# Allegro board MACHLORA_02_03Jul25_02.brd
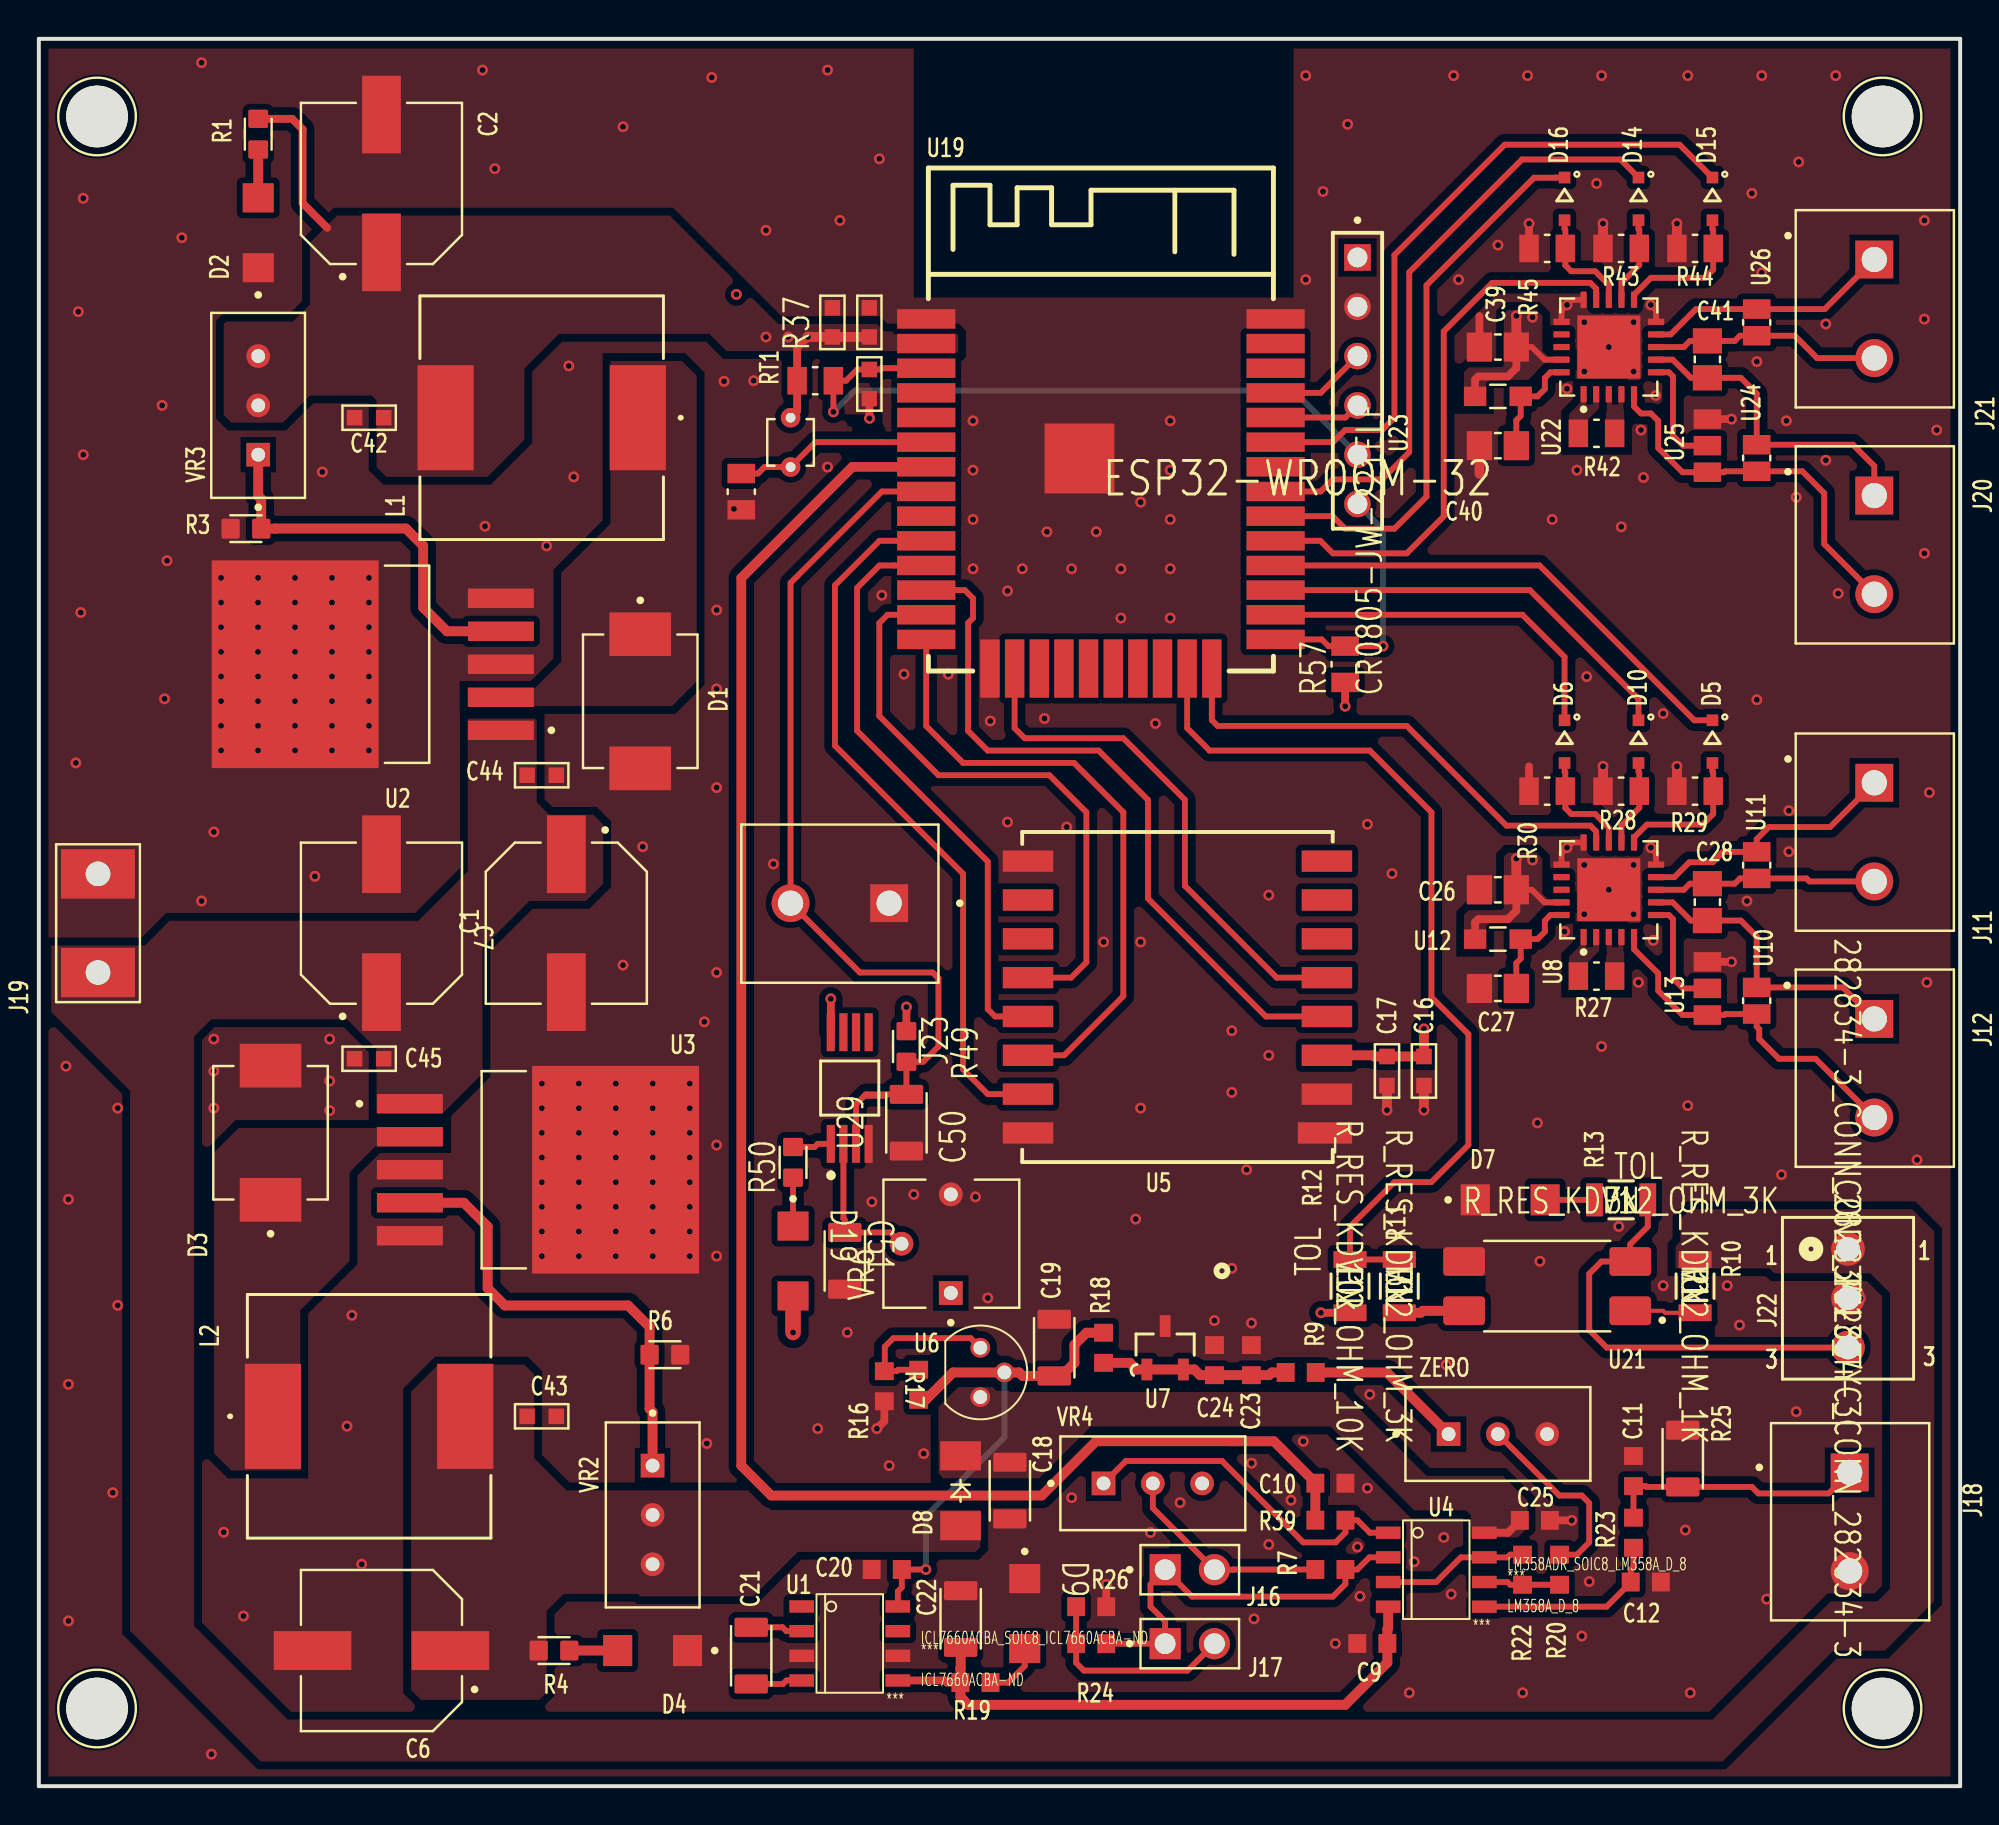
[diagram p0: board, top side]
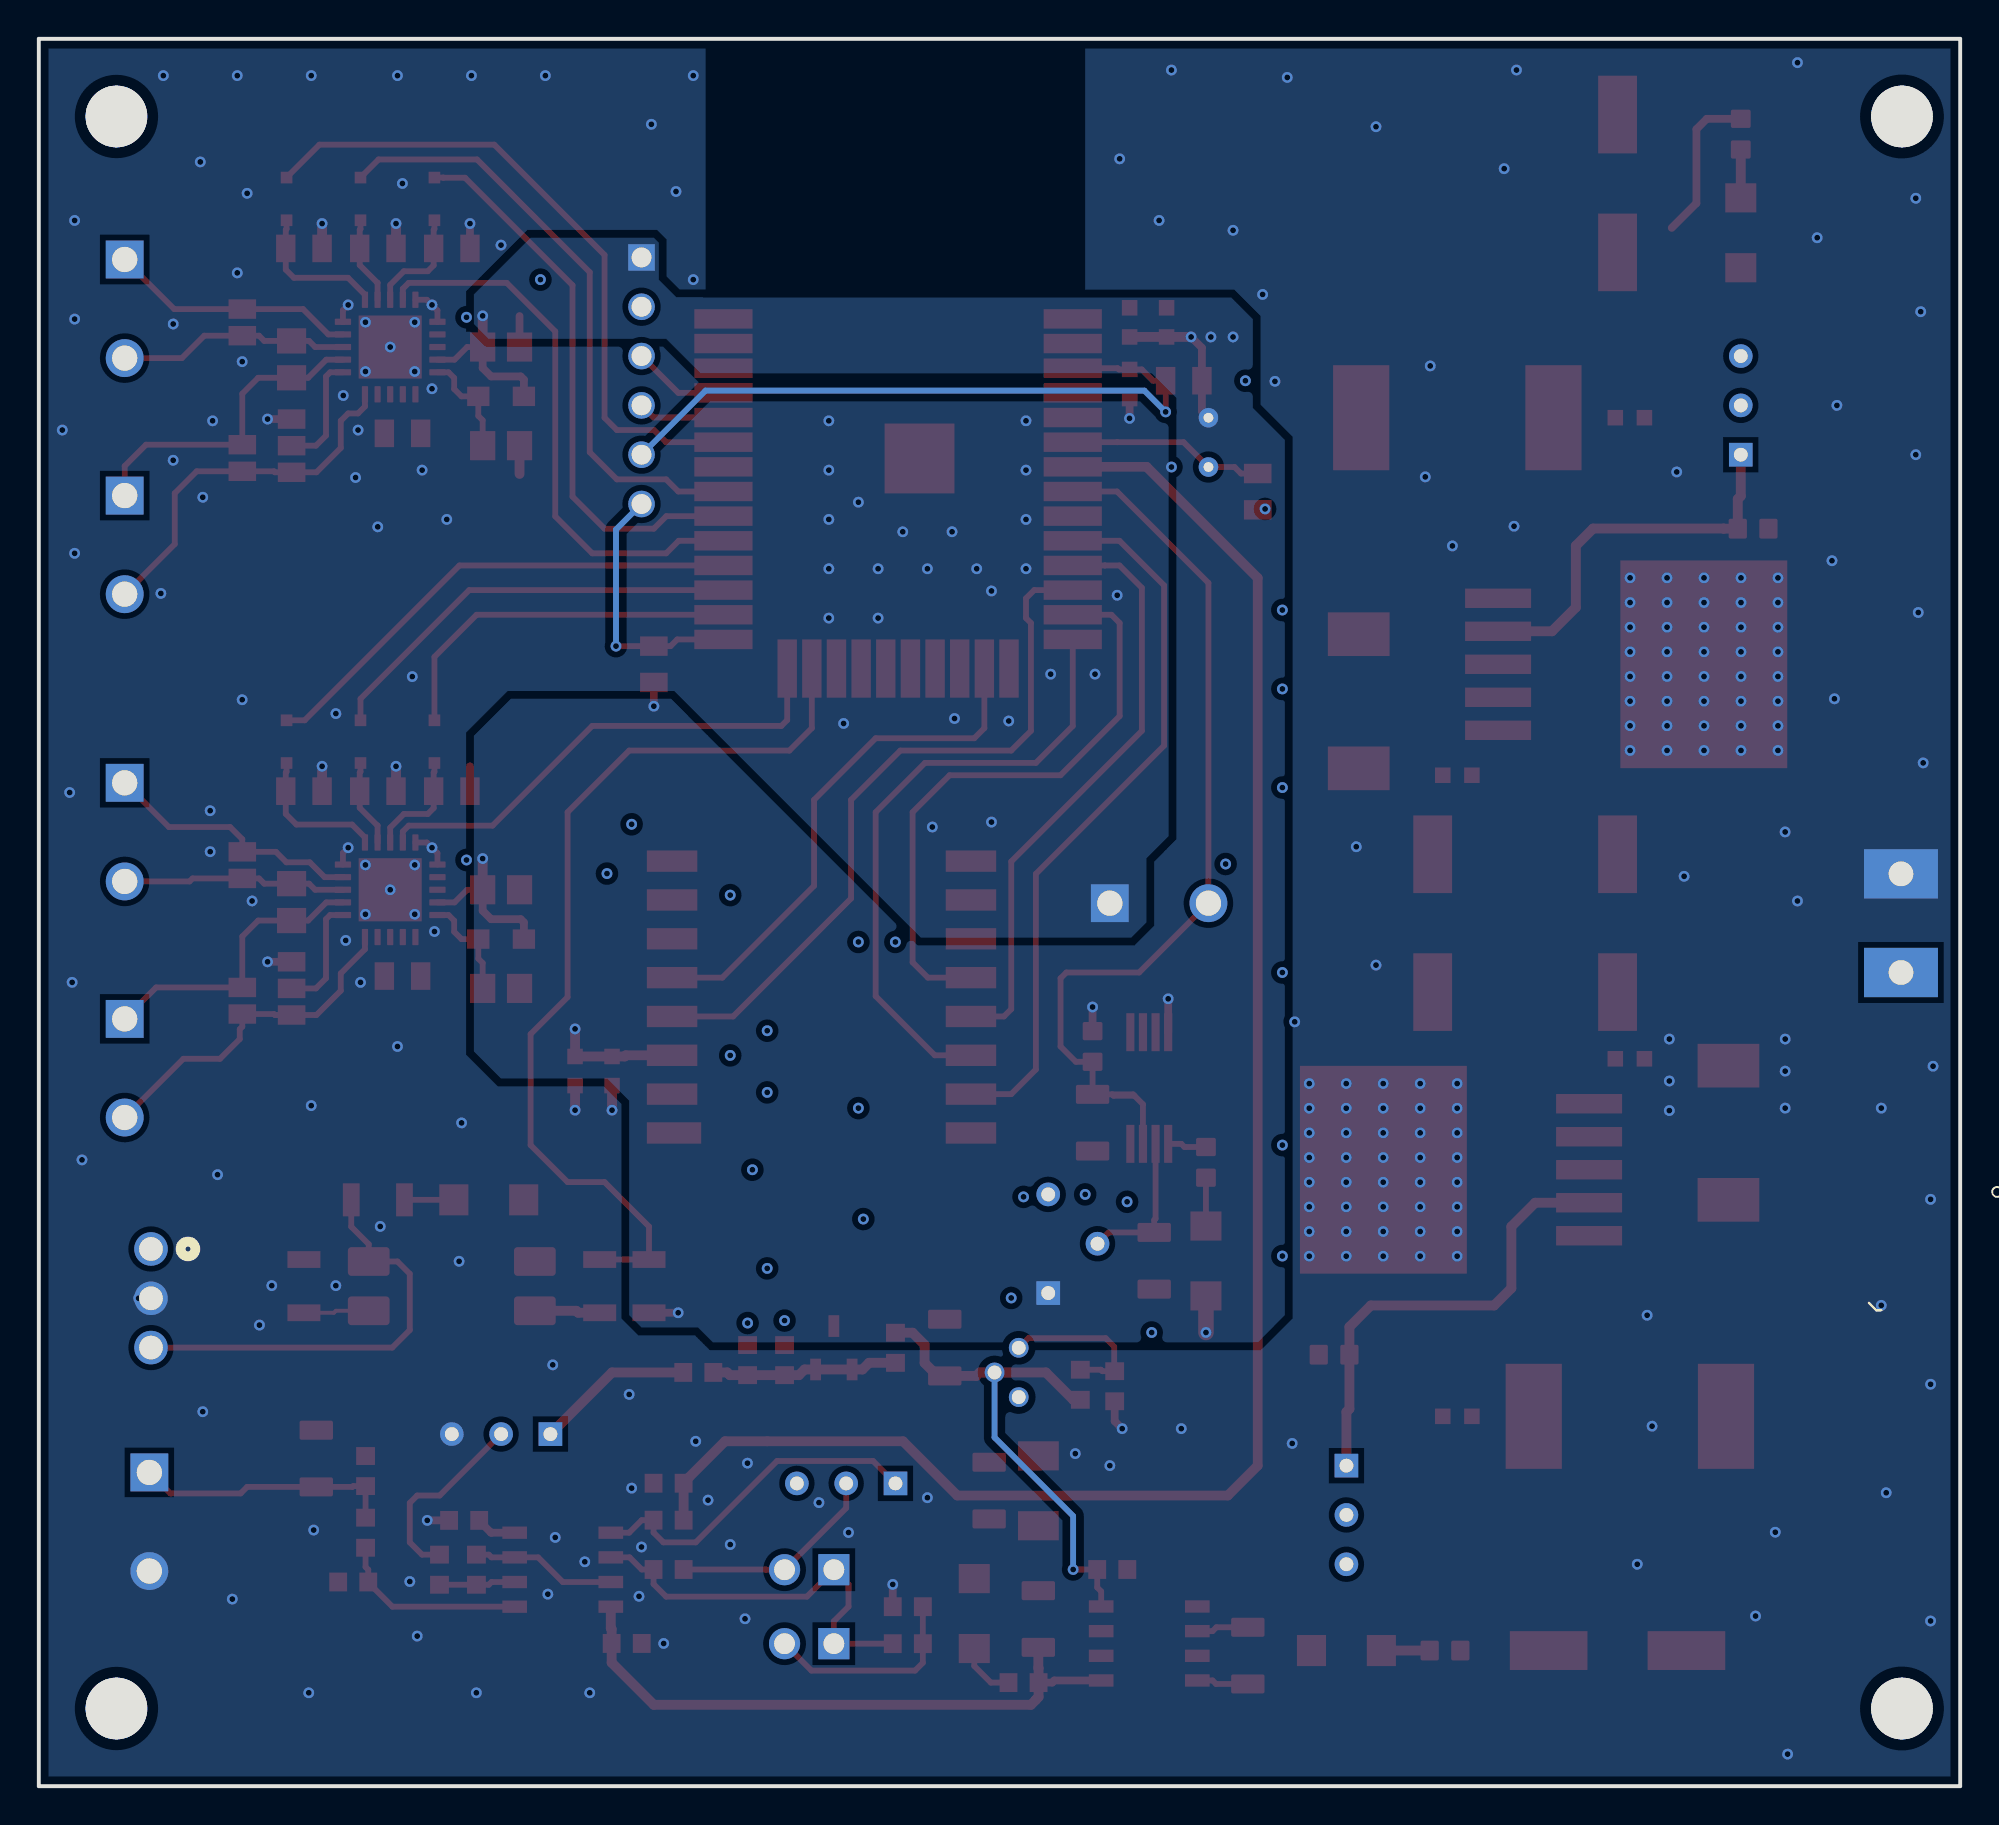
[diagram p1: board, bottom side, seen from below]

Outline 99 x 90 mm; copper layers: TOP, BOTTOM. Coordinates in mm from the lower left corner of the outline.
Outline path: 0,90 0,0 99,0 99,90 0,90

## Design rules (mm)
constraint set DEFAULT: min track width 0.3, pair gap 0.203
net group PWR: nets U1_VOUT VOUT

## Placement (name value [footprint] x y rotation side)
C1  100uF  [CAP_EEEFK1H101P]  27.18 44.45 270 top
C2  220uF  [CAP_EEEFK1V221P]  17.66 82.55 90 top
C6  220uF  [CAP_EEEFK1V221P]  17.66 6.99 180 top
C7  100uF  [CAP_EEEFK1H101P]  17.66 44.45 90 top
C9  100n  [CAPC1608X95]  68.71 7.35 180 top
C10  0.1n  [CAPC1608X95]  66.55 15.61 0 top
C11  0.1n  [CAPC1608X95]  82.17 16.23 270 top
C12  0.1n  [CAPC1608X95]  82.8 10.52 180 top
C16  10uF  [TUDIEN0603]  71.37 36.84 270 top
C17  0.1uF  [TUDIEN0603]  69.47 36.84 270 top
C18  10u  [RESC3015X65]  50.03 15.21 270 top
C19  10u  [RESC3015X65]  52.32 22.58 270 top
C20  100n  [CAPC1608X95]  43.69 11.16 180 top
C21  10u  [RESC3015X65]  36.7 6.71 270 top
C22  10u  [RESC3015X65]  47.5 8.62 90 top
C23  100n  [CAPC1608X95]  62.48 21.95 90 top
C24  1000n  [CAPC1608X95]  60.58 21.95 90 top
C25  100n  [CAPC1608X95]  77.08 13.69 0 top
C26  0.1uF  [TUDIEN0805]  75.18 46.17 0 top
C27  0.1uF  [TUDIEN0805]  75.18 41.09 180 top
C28  CAP NP  [TUDIEN0805]  85.97 45.53 90 top
C35  0.1uF  [TUDIEN0603]  42.8 75.39 90 top
C36  10uF  [TUDIEN0603]  40.89 75.39 90 top
C37  100nF  [TUDIEN0603]  42.8 72.22 270 top
C39  0.1uF  [TUDIEN0805]  75.18 74.12 0 top
C40  0.1uF  [TUDIEN0805]  75.18 69.05 180 top
C41  CAP NP  [TUDIEN0805]  85.97 73.49 90 top
C42  104  [TUDIEN0603]  17.02 70.48 180 top
C43  104  [TUDIEN0603]  25.91 19.05 0 top
C44  104  [TUDIEN0603]  25.91 52.07 0 top
C45  104  [TUDIEN0603]  17.02 37.47 180 top
C50  104  [RESC3015X65]  44.7 34.16 270 top
C51  104  [RESC3015X65]  41.53 27.05 270 top
D1  1N5822  [DIOM7959X265N]  30.99 55.88 270 top
D2  LED  [LED_LTST-C230KRKT]  11.3 80.01 90 top
D3  1N5822  [DIOM7959X265N]  11.94 33.66 90 top
D4  LED  [LED_LTST-C230KRKT]  31.62 6.99 180 top
D5  1N4148  [SOD323]  86.23 53.8 270 top
D6  1N4148  [SOD323]  78.61 53.8 270 top
D7  LED  [LED_LTST-C230KRKT]  75.81 30.2 0 top
D8  DIODE  [SOD-123]  47.49 15.21 270 top
D9  LED  [LED_LTST-C230KRKT]  50.8 8.89 270 top
D10  1N4148  [SOD323]  82.42 53.8 270 top
D14  1N4148  [SOD323]  82.42 81.75 270 top
D15  1N4148  [SOD323]  86.23 81.75 270 top
D16  1N4148  [SOD323]  78.61 81.75 270 top
D19  LED  [LED_LTST-C230KRKT]  38.86 27.05 270 top
J1  BBS-106-X-X  [SAMTEC_MTSW-106-24-T-S-380]  67.94 72.39 90 top
J11  CON2  [PHOENIX_1729128]  90.53 54.22 270 top
J12  CON2  [PHOENIX_1729128]  90.53 42.06 270 top
J16  CON2  [HARWIN_M20-9990246]  59.3 11.15 0 top
J17  CON2  [HARWIN_M20-9990246]  59.3 7.34 0 top
J18  CON2  [PHOENIX_1729128]  89.25 18.7 270 top
J19  CON2  [POWER_IN]  3.05 46.99 270 top
J20  CON2  [PHOENIX_1729128]  90.53 69.02 270 top
J21  CON2  [PHOENIX_1729128]  90.53 81.17 270 top
J22  CONN_282834-3  [CONN_282834-3_TYC]  93.22 27.67 270 top
J23  CON2  [PHOENIX_1729128]  46.35 49.53 180 top
L1  470uH  [IND_CDRH127LDNP-470MC_SUM]  25.91 70.48 180 top
L2  470uH  [IND_CDRH127LDNP-470MC_SUM]  17.02 19.05 0 top
NOREF  -  []  -132.08 -100.2 0 top
NOREF#2  -  []  0 0 90 top
NOREF#3  -  [unnamed#2]  3 86 270 top
NOREF#4  -  [unnamed#2]  3 4 270 top
NOREF#5  -  []  0 0 0 top
NOREF#6  -  [unnamed#2]  95 86 270 top
NOREF#7  -  [unnamed#2]  95 4 270 top
R1  1K  [RESC1608X50N_CPF0603F10KC1]  11.3 85.09 270 top
R3  330  [RESC1608X50N_CPF0603F10KC1]  10.67 64.77 180 top
R4  1K  [RESC1608X50N_CPF0603F10KC1]  26.55 6.99 0 top
R6  330  [RESC1608X50N_CPF0603F10KC1]  32.26 22.23 0 top
R7  15k  [CAPC1608X95]  66.55 11.16 0 top
R9  2k  [CAPC1608X95]  65.02 21.31 0 top
R10  1k  [RES_KDV12_OHM]  85.34 25.75 270 top
R11  3k  [RES_KDV12_OHM]  70.1 25.75 270 top
R12  10k  [RES_KDV12_OHM]  67.56 25.75 270 top
R13  3k  [RES_KDV12_OHM]  81.53 30.2 0 top
R16  280  [CAPC1608X95]  45.34 20.68 270 top
R17  240  [CAPC1608X95]  43.56 20.6 90 top
R18  4.7k  [CAPC1608X95]  54.86 22.58 270 top
R19  10k  [CAPC1608X95]  48.26 5.33 180 top
R20  20.5k  [CAPC1608X95]  78.36 11.15 90 top
R22  10k  [CAPC1608X95]  76.45 11.15 270 top
R23  10k  [CAPC1608X95]  82.17 13.05 90 top
R24  51k  [CAPC1608X95]  54.23 7.34 0 top
R25  1  [RESC3015X65]  84.7 16.86 270 top
R26  10k  [CAPC1608X95]  54.23 9.24 0 top
R27  430  [DIENTRO0805]  80.26 41.73 180 top
R28  10K  [DIENTRO0805]  81.53 51.25 0 top
R29  10K  [DIENTRO0805]  85.34 51.25 0 top
R30  10K  [DIENTRO0805]  77.72 51.25 0 top
R37  10K  [DIENTRO0805]  40.01 72.39 0 top
R39  10  [CAPC1608X95]  66.55 13.7 0 top
R42  430  [DIENTRO0805]  80.26 69.68 180 top
R43  10K  [DIENTRO0805]  81.53 79.2 0 top
R44  10K  [DIENTRO0805]  85.34 79.2 0 top
R45  10K  [DIENTRO0805]  77.72 79.2 0 top
R46  10K  [DIENTRO0805]  36.2 66.67 90 top
R49  10k  [RESC1608X50N_CPF0603F10KC1]  44.7 38.1 270 top
R50  1k  [RESC1608X50N_CPF0603F10KC1]  38.86 32.13 90 top
R57  10K  [DIENTRO0805]  67.31 57.78 90 top
RT1  NTC  [THERM_701007-M]  38.73 69.22 270 top
U1  ICL7660ACBA-ND  [SOIC8]  41.78 7.35 0 top
U2  LM2596  [VREG_LM2596S-33NOPB]  13.21 57.78 180 top
U3  LM2596  [VREG_LM2596S-33NOPB]  29.72 31.75 0 top
U4  LM358A_D_8  [SOIC8]  72 11.15 0 top
U5  -  [RA-02]  58.67 40.65 180 top
U6  LM317LZNOPB  [TO92VAR]  48.51 22.58 0 top
U7  TL431ASA-7  [SOT95P240X135-3N]  58.03 22.58 270 top
U8  MAX31865ATP+T  [QFN65P500X500X80-21N]  80.89 46.17 90 top
U10  SOLDERJUMPER  [SOLDER]  88.52 40.45 270 top
U11  SOLDERJUMPER  [SOLDER]  88.52 47.44 270 top
U12  -  [FERRITE]  75.18 43.63 180 top
U13  JUMBER_1  [SOLDER2WAY]  85.97 41.09 270 top
U19  ESP32-WROOM-32  [WIRELM-SMD_ESP32-S]  54.72 66.57 0 top
U21  PC817X2NIP1B  [SOIC254P960X420-4N]  77.72 25.75 180 top
U22  MAX31865ATP+T  [QFN65P500X500X80-21N]  80.89 74.12 90 top
U23  -  [FERRITE]  75.18 71.58 180 top
U24  SOLDERJUMPER  [SOLDER]  88.52 68.41 270 top
U25  JUMBER_1  [SOLDER2WAY]  85.97 69.05 270 top
U26  SOLDERJUMPER  [SOLDER]  88.52 75.39 270 top
U29  LM393  [PW0008A-IPC_A]  41.78 35.96 90 top
VR2  3296W-1-104LF  [TRIM_3296W-1-104LF]  31.62 13.97 270 top
VR3  3296W-1-104LF  [TRIM_3296W-1-104LF]  11.3 71.12 90 top
VR4  RESISTOR VAR  [TRIM_3296W-1-103]  57.4 15.6 0 top
VR6  10k  [TRIM_3362P-1-103LF]  46.99 27.94 90 top
ZERO  RESISTOR VAR  [TRIM_3296W-1-103]  75.18 18.14 0 top

## Library data of the parts
C1 C2 C6 C7 = CAP
C9-C12 C18-C25 C50 C51 = CAP NP_5
C16 C17 C26-C28 C35-C37 C39-C45 = CAP NP
D1 D3 = DIODE SCHOTTKY_0
D2 D4 D7 D9 D19 = LED_1
D5 D6 D8 D10 D14-D16 = DIODE_3
J1 = CON6
J11 J12 J16-J21 J23 = CON2_5
J22 = 282834-3: User Part Number: PN; Tolerance: TOL
L1 L2 = INDUCTOR IRON
R1 R3 R4 R6 R27-R30 R42-R46 = R
R7 R9 R16-R20 R22-R26 R37 R39 R49 R50 R57 = RESISTOR
R10-R13 = R: Tolerance: TOL; User Part Number: PN
RT1 = 11026588-00
U1 = ICL7660ACBA: User Part Number: ***; Tolerance: ***
U2 U3 = LM2596S-ADJNOPB_0
U4 = LM358ADR: User Part Number: ***; Tolerance: ***
U5 = RA-02_U4
U6 = LM317LZNOPB
U7 = TL431ASA-7_0
U8 U22 = MAX31865ATP+T_U5
U10 U11 U24 U26 = JUMBER_1
U12 U23 = FERRITE
U13 U25 = JUMBER
U19 = ESP32-WROOM-32_4
U21 = PC817X2NIP1B_0
U29 = LM393
VR2 VR3 VR6 = 3296W-1-104LF_0
VR4 ZERO = RESISTOR VAR

## Footprints (pads in the part's own frame, mm; a bottom-side part is the same pattern mirrored in y, then rotated)
CAP_EEEFK1H101P
  rect 4x2 smd: 1(-3.55,0) 2(3.55,0)
CAP_EEEFK1V221P
  rect 4x2 smd: 1(-3.55,0) 2(3.55,0)
CAPC1608X95
  rect 0.92x0.97 smd: 1(-0.775,0) 2(0.775,0)
CONN_282834-3_TYC
  round 1.727 hole 1.219: 1(0,0) 2(2.54,0) 3(5.08,0)
DIENTRO0805
  rect 1x1.42 smd: 1(-0.935,0) 2(0.935,0)
DIOM7959X265N
  rect 2.25x3.18 smd: A(3.455,0) C(-3.455,0)
FERRITE
  rect 1.15x1 smd: 1(-1.175,0) 2(1.175,0)
HARWIN_M20-9990246
  rect 1.605x1.605 hole 1.07: 1(-1.27,0)
  round 1.605 hole 1.07: 2(1.27,0)
IND_CDRH127LDNP-470MC_SUM
  rect 2.896x5.41 smd: 1(-4.953,0) 2(4.953,0)
LED_LTST-C230KRKT
  rect 1.5x1.6 smd: A(1.8,0) C(-1.8,0)
PHOENIX_1729128
  rect 1.95x1.95 hole 1.3: 1(2.54,4.05)
  round 1.95 hole 1.3: 2(7.62,4.05)
POWER_IN
  rect 2.54x3.81 hole 1.27: 1(0,0) 2(5.08,0)
PW0008A-IPC_A
  rect 1.955x0.421 smd: 1(-2.875,0.975) 2(-2.875,0.325) 3(-2.875,-0.325) 4(-2.875,-0.975) 5(2.875,-0.975) 6(2.875,-0.325) 7(2.875,0.325) 8(2.875,0.975)
QFN65P500X500X80-21N
  custom 0.84x0.32 smd: 1(-2.435,1.3) 2(-2.435,0.65) 3(-2.435,0) 4(-2.435,-0.65) 5(-2.435,-1.3) 11(2.435,-1.3) 12(2.435,-0.65) 13(2.435,0) 14(2.435,0.65) 15(2.435,1.3)
  custom 0.32x0.84 smd: 6(-1.3,-2.435) 7(-0.65,-2.435) 8(0,-2.435) 9(0.65,-2.435) 10(1.3,-2.435) 16(1.3,2.435) 17(0.65,2.435) 18(0,2.435) 19(-0.65,2.435) 20(-1.3,2.435)
  rect 3.25x3.25 smd: 21(0,0)
RA-02
  rect 2.8x1.1 smd: 1(-7.6,7)
  rect 2.6x1.1 smd: 2(-7.7,5) 3(-7.7,3) 4(-7.7,1) 5(-7.7,-1) 6(-7.7,-3) 7(-7.7,-5) 8(-7.7,-7) 9(7.7,-7) 10(7.7,-5) 11(7.7,-3) 12(7.7,-1) 13(7.7,1) 14(7.7,3) 15(7.7,5) 16(7.7,7)
RES_KDV12_OHM
  rect 0.864x1.702 smd: 1(-1.372,0) 2(1.372,0)
RESC1608X50N_CPF0603F10KC1
  custom 0.94x1.02 smd: 1(-0.79,0) 2(0.79,0)
RESC3015X65
  custom 0.98x1.72 smd: 1(-1.47,0) 2(1.45,0)
SAMTEC_MTSW-106-24-T-S-380
  rect 1.37x1.37 hole 1.02: 1(6.35,0)
  round 1.37 hole 1.02: 2(3.81,0) 3(1.27,0) 4(-1.27,0) 5(-3.81,0) 6(-6.35,0)
SOD323
  rect 0.6x0.6 smd: A(1.1,0) C(-1.1,0)
SOD-123
  rect 1.5x2.1 smd: A(1.8,0) C(-1.8,0)
SOIC8
  rect 1.27x0.635 smd: 1(-2.477,1.905) 2(-2.477,0.635) 3(-2.477,-0.635) 4(-2.477,-1.905) 5(2.477,-1.905) 6(2.477,-0.635) 7(2.477,0.635) 8(2.477,1.905)
SOIC254P960X420-4N
  custom 2.15x1.48 smd: 1(-4.28,1.27) 2(-4.28,-1.27) 3(4.28,-1.27) 4(4.28,1.27)
SOLDER
  rect 1x1.42 smd: 1(-0.685,0) 2(0.685,0)
SOLDER2WAY
  rect 1x1.42 smd: 1(-1.37,0) 2(0,0) 3(1.37,0)
SOT95P240X135-3N
  rect 1.118x0.559 smd: 1(1.118,-0.94) 2(1.118,0.94) 3(-1.118,0)
THERM_701007-M
  round 1.008 hole 0.5: 1(-1.27,0) 2(1.27,0)
TO92VAR
  round 1.016 hole 0.711: 1(0,0) 2(1.245,-1.27) 3(0,-2.54)
TRIM_3296W-1-103
  rect 1.218x1.218 hole 0.71: 1(-2.54,0)
  round 1.218 hole 0.71: 2(0,0) 3(2.54,0)
TRIM_3296W-1-104LF
  rect 1.218x1.218 hole 0.71: 1(-2.54,0)
  round 1.218 hole 0.71: 2(0,0) 3(2.54,0)
TRIM_3362P-1-103LF
  rect 1.222x1.222 hole 0.714: 1(-2.54,0)
  round 1.222 hole 0.714: 2(0,2.54) 3(2.54,0)
TUDIEN0603
  rect 0.8x0.8 smd: 1(-0.75,0) 2(0.75,0)
TUDIEN0805
  rect 1.3x1.5 smd: 1(-0.95,0) 2(0.95,0)
unnamed#2
  round 3.175 hole 3.2 unplated: (0,0)
VREG_LM2596S-33NOPB
  rect 3.4x1 smd: 1(-10.6,3.4) 2(-10.6,1.7) 3(-10.6,0) 4(-10.6,-1.7) 5(-10.6,-3.4)
  rect 8.6x10.7 smd: 6(0,0)
WIRELM-SMD_ESP32-S
  rect 3x1 smd: 1(-9,9.005) 2(-9,7.735) 3(-9,6.465) 4(-9,5.195) 5(-9,3.925) 6(-9,2.655) 7(-9,1.385) 8(-9,0.115) 9(-9,-1.155) 10(-9,-2.425) 11(-9,-3.695) 12(-9,-4.965) 13(-9,-6.235) 14(-9,-7.505) 25(9,-7.505) 26(9,-6.235) 27(9,-4.965) 28(9,-3.695) 29(9,-2.425) 30(9,-1.155) 31(9,0.115) 32(9,1.385) 33(9,2.655) 34(9,3.925) 35(9,5.195) 36(9,6.465) 37(9,7.735) 38(9,9.005)
  rect 1x3 smd: 15(-5.715,-9.005) 16(-4.445,-9.005) 17(-3.175,-9.005) 18(-1.905,-9.005) 19(-0.635,-9.005) 20(0.635,-9.005) 21(1.905,-9.005) 22(3.175,-9.005) 23(4.445,-9.005) 24(5.715,-9.005)
  rect 3.6x3.6 smd: 39(-1.105,1.815)

## Nets
3.3V: C2.1 C16.1 C17.1 C26.2 C35.1 C36.1 C39.2 C42.1 D19.A J1.1 L1.2 R1.1 R12.2 R37.1 R49.1 R57.1 RT1.1 U5.3 U8.19 U12.2(OUT) U19.2 U22.19 U23.2(OUT) U29.8(VCC) VR3.2 VR3.3 VR6.1
24V: C1.1 C7.1 C44.1 C45.1 J19.2 J22.1 R10.1 U2.1(VIN) U3.1(VIN)
GND: C1.2 C2.2 C6.2 C7.2 C9.2 C10.2 C11.1 C12.1 C16.2 C17.2 C18.2 C19.1 C20.2 C22.2 C23.2 C24.2 C25.2 C26.1 C27.2 C35.2 C36.2 C37.2 C39.1 C40.2 C42.2 C43.2 C44.2 C45.2 C50.2 C51.2 D1.A D2.C(CATHODE) D3.A D4.C(CATHODE) D7.C(CATHODE) D9.C(CATHODE) J1.2 J18.2 J19.1 J22.2 J23.1 R3.2 R6.2 R17.1 R25.1 R26.2 R28.1 R29.1 R30.1 R43.1 R44.1 R45.1 R46.1 U1.3 U1.6 U2.3 U2.5 U2.6 U3.3 U3.5 U3.6 U5.1 U5.2 U5.9 U5.16 U7.3 U8.10 U8.15 U8.16 U8.21 U13.1 U19.1 U19.15 U19.38 U19.39 U21.3 U22.10 U22.15 U22.16 U22.21 U25.1 U29.4 VR6.3 ZERO.3
VCC_IN: C6.1 C43.1 D8.A L2.2 R4.1 VR2.2 VR2.3
ESP_BOOT: J1.6 R57.2 U19.25
ESP_EN: C37.1 J1.5 R37.2 U19.3
G2: D6.C U19.26
G4: D5.C U19.28
G5: D16.C U19.30
G12: U5.14 U19.14
G13: U5.5 U19.16
G14: U5.15 U19.10
G15: R11.1 R12.1 U19.23
G16: U8.14 U19.24
G17: D10.C U19.27
G18: D15.C U19.33
G19: U19.29 U22.14
G21: D14.C U19.31
G22: U19.36
G23: U19.37
G25: U5.13 U19.11
G26: U5.12(SCK) U19.13
G27: U5.4 U19.12
G32: C50.1 J23.2 R49.2 U19.8 U29.3
G34: R46.2 RT1.2 U19.6
I+: C11.2 J18.1 R23.2 R25.2
IN: C18.1 C25.1 D8.C U4.8(VCC) U6.3
U0RXD: J1.4 U19.34
U0TXD: J1.3 U19.35(TXD0)
U1_VOUT: C9.1 C22.1 R19.2 U1.5(VOUT) U4.4
VOUT: C10.1 R39.1 U19.7
N01978: R3.1 U2.4 VR3.1
N02042: D1.C L1.1 U2.2
N02781: R6.1 U3.4 VR2.1
N02845: D3.C L2.1 U3.2
N06098: R10.2 U21.1
N06176: J22.3 R13.2 U21.2
N06202: D7.A R13.1
N68395: C19.2 C20.1 R16.2 R18.1 U1.8 U6.2(OUT)
N68453: R16.1 R17.2 U6.1
N68779: C21.1 U1.2
N68835: C21.2 U1.4
N68993: R9.2 ZERO.1
N68997: C23.1 C24.1 R9.1 R18.2 U7.1 U7.2(REF)
N69029: J16.2 R7.1 VR4.2(WIPER)
N69045: D9.A R19.1
N69079: R20.2 ZERO.2(WIPER)
N69131: R22.1 U4.3 U4.7
N69159: R39.2 U4.1 VR4.1
N69271: J16.1 J17.1 R7.2 R24.2 U4.2
N69285: R20.1 R22.2 U4.6
N69431: J17.2 R24.1 R26.1
N69489: C12.2 R23.1 U4.5
N70734: R27.2 U8.1 U8.2
N70746: C27.1 U8.20(VDD) U12.1
N70822: D10.A R28.2 U8.12
N70834: R27.1 U8.3 U8.4
N70882: J12.2 U8.5 U10.2(OUT) U13.3(OUT)
N70902: D5.A R29.2 U8.11
N70994: U8.6 U13.2
N71002: D6.A R30.2 U8.13
N71034: C28.1 J12.1 U8.7 U10.1
N71106: C28.2 J11.2 U8.8 U11.2(OUT)
N71126: J11.1 U8.9 U11.1
N77169: D4.A R4.2
N77173: D2.A R1.2
N121988: R11.2 U21.4
N166051: R42.2 U22.1 U22.2
N166063: C40.1 U22.20(VDD) U23.1
N166139: D14.A R43.2 U22.12
N166153: R42.1 U22.3 U22.4
N166201: J20.2 U22.5 U24.2(OUT) U25.3(OUT)
N166221: D15.A R44.2 U22.11
N166321: U22.6 U25.2
N166329: D16.A R45.2 U22.13
N166363: C41.1 J20.1 U22.7 U24.1
N166435: C41.2 J21.2 U22.8 U26.2(OUT)
N166455: J21.1 U22.9 U26.1
N209857: C51.1 U29.2 VR6.2
N210245: D19.C(CATHODE) R50.1
N210249: R50.2 U29.1

Pads without a net: U1 1 7; U5 6 7 8 10 11; U8 17 18; U19 4 5 9 17 18 19 20 21 22 32; U22 17 18; U29 5 6 7; VR4 3

## Via types
v1: diameter 0.559, hole 0.305, TOP to BOTTOM, 311 vias

## Routing (per net, layer and track width the routed paths; a pad name or vN(x,y) marks a point on that pad's centre or on a via; arc(x,y) is an arc through that point)
3.3V: length 46.9
  TOP w0.3: C26.2 76.93,46.17 77.58,45.52 U8.19 ; U22.19 77.58,73.47 76.93,74.12 C39.2
  TOP w0.4: R57.1 v1(67.31,55.63) ; RT1.1 39.07,70.82 R37.1 39.07,74.09 v1(39.63,74.64) ; R1.1 13.05,85.88 13.59,85.34 13.59,81.53 14.86,80.26 ; 74,43.63 74,44.49 74.17,44.66 75.69,44.66 76.13,45.09 C26.2 ; U29.8 v1(40.81,40.55) ; 74,71.58 74,72.45 74.17,72.61 75.69,72.61 76.13,73.05 C39.2 ; R49.1 v1(44.7,40.13) ; R12.2 v1(66.06,24.38)
  TOP w0.508: v1(71.37,39) C16.1 C17.1 68.81,37.59 68.75,37.65 U5.3 ; C39.2 v1(76.13,75.73) ; C26.2 v1(76.13,47.78) ; C35.1 C36.1 v1(39.63,74.64)
  TOP w0.8: 38.86,25.25 v1(38.86,23.37)
  vias: v1(37.47,74.64) v1(38.61,74.64) v1(76.96,75.66) v1(76.96,47.7)
GND: length 26.5
  TOP w0.3: U22.15 79.01,76.56 v1(78.74,76.29) 78.46,76.01 U22.16 ; U8.10 83.33,48.07 v1(83.06,48.34) ; U8.16 78.46,48.06 v1(78.74,48.34) 79.01,48.6 79.59,48.6 ; v1(83.06,76.29) 83.33,76.02 U22.10
  TOP w0.4: C39.1 74.23,75.72 ; U13.1 v1(87.21,42.46) ; v1(42.8,70.45) 42.8,70.46 C37.2 ; R30.1 76.78,52.53 ; 43.56,19.82 43.56,18.8 v1(43.18,18.41) ; R45.1 v1(76.78,80.48) ; U25.1 v1(87.21,70.42) ; C25.2 v1(78.99,13.69) ; R26.2 v1(55,10.39)
  TOP w0.508: C16.2 v1(71.37,34.82) ; C40.2 74.23,67.59 ; R43.1 v1(80.59,80.48) ; R29.1 v1(84.41,52.53) ; R44.1 v1(84.41,80.48) ; C17.2 v1(69.47,34.82) ; R28.1 v1(80.59,52.53)
  vias: v1(1.4,37.08) v1(1.53,30.23) v1(1.53,20.7) v1(1.53,8.51) v1(1.91,52.7) v1(2.03,75.95) v1(2.16,60.45) v1(2.29,81.79) v1(2.29,68.58) v1(3.81,15.11) v1(4.07,34.92) v1(4.07,24.77) v1(6.35,71.12) v1(6.48,56.01) v1(6.61,63.12) v1(7.37,79.76) v1(8.38,88.77) v1(8.38,45.59) v1(8.89,1.65) v1(9.02,49.15) v1(9.02,38.48) v1(9.02,36.83) v1(9.02,34.92) v1(9.39,62.24) v1(9.39,60.97) v1(9.39,59.7) v1(9.39,58.43) v1(9.39,57.16) v1(9.39,55.89) v1(9.39,54.62) v1(9.39,53.35) v1(9.53,13.08) v1(10.54,8.76) v1(11.29,62.24) v1(11.29,60.97) v1(11.29,59.7) v1(11.29,58.43) v1(11.29,57.16) v1(11.29,55.89) v1(11.29,54.62) v1(11.29,53.35) v1(13.2,62.24) v1(13.2,60.97) v1(13.2,59.7) v1(13.2,58.43) v1(13.2,57.16) v1(13.2,55.89) v1(13.2,54.62) v1(13.2,53.35) v1(14.23,46.86) v1(14.61,67.69) v1(14.99,38.48) v1(14.99,36.32) v1(14.99,34.8) v1(15.11,62.24) v1(15.11,60.97) v1(15.11,59.7) v1(15.11,58.43) v1(15.11,57.16) v1(15.11,55.89) v1(15.11,54.62) v1(15.11,53.35) v1(15.88,18.54) v1(16.13,24.26) v1(16.64,11.43) v1(17.01,62.24) v1(17.01,60.97) v1(17.01,59.7) v1(17.01,58.43) v1(17.01,57.16) v1(17.01,55.89) v1(17.01,54.62) v1(17.01,53.35) v1(22.86,88.39) v1(22.99,64.9) v1(23.5,83.31) v1(25.92,36.19) v1(25.92,34.92) v1(25.92,33.65) v1(25.92,32.38) v1(25.92,31.11) v1(25.92,29.84) v1(25.92,28.57) v1(25.92,27.3) v1(26.16,63.88) v1(27.31,73.15) v1(27.56,67.44) v1(27.82,36.19) v1(27.82,34.92) v1(27.82,33.65) v1(27.82,32.38) v1(27.82,31.11) v1(27.82,29.84) v1(27.82,28.57) v1(27.82,27.3) v1(29.73,36.19) v1(29.73,34.92) v1(29.73,33.65) v1(29.73,32.38) v1(29.73,31.11) v1(29.73,29.84) v1(29.73,28.57) v1(29.73,27.3) v1(30.1,85.47) v1(30.1,42.29) v1(31.12,48.39) v1(31.64,36.19) v1(31.64,34.92) v1(31.64,33.65) v1(31.64,32.38) v1(31.64,31.11) v1(31.64,29.84) v1(31.64,28.57) v1(31.64,27.3) v1(33.54,36.19) v1(33.54,34.92) v1(33.54,33.65) v1(33.54,32.38) v1(33.54,31.11) v1(33.54,29.84) v1(33.54,28.57) v1(33.54,27.3) v1(34.29,39.37) v1(34.42,17.65) v1(34.67,88.01) v1(34.93,60.58) v1(34.92,56.52) v1(34.92,51.44) v1(34.92,41.91) v1(34.92,33.02) v1(34.92,27.3) v1(35.31,72.36) v1(35.82,65.79) v1(35.94,76.83) v1(36.83,72.39) v1(37.47,80.14) v1(37.85,47.5) v1(40.13,18.41) v1(40.64,88.39) v1(40.64,67.94) v1(41.28,80.64) v1(41.66,23.37) v1(42.93,30.1) v1(43.31,83.82) v1(43.44,61.34) v1(43.81,16.51) v1(44.58,57.28) v1(45.09,30.48) v1(45.59,17.13) v1(46.87,57.28) v1(48.13,70.33) v1(48.13,67.78) v1(48.13,65.25) v1(48.13,62.7) v1(48.26,30.35) v1(48.9,25.15) v1(49.02,54.86) v1(49.91,61.56) v1(49.91,49.66) v1(50.67,62.7) v1(51.82,54.99) v1(51.95,64.61) v1(52.96,49.4) v1(53.22,62.7) v1(53.22,14.86) v1(54.48,64.61) v1(54.87,43.48) v1(55.76,62.7) v1(55.76,60.16) v1(56.52,29.21) v1(56.77,66.13) v1(56.77,43.48) v1(56.77,34.92) v1(57.28,13.06) v1(57.53,54.74) v1(58.3,70.33) v1(58.3,67.78) v1(58.3,65.25) v1(58.3,62.7) v1(58.3,60.16) v1(58.8,14.61) v1(60.58,23.98) v1(61.47,38.91) v1(61.47,35.73) v1(61.47,26.67) v1(62.23,31.75) v1(62.48,23.85) v1(62.49,16.64) v1(62.61,8.62) v1(63.38,45.9) v1(63.38,37.64) v1(63.38,12.45) v1(64.52,14.73) v1(65.15,17.76) v1(65.28,88.11) v1(65.28,77.6) v1(66.17,82.14) v1(66.8,7.35) v1(67.44,85.6) v1(67.95,12.32) v1(68.07,9.78) v1(68.45,49.55) v1(68.45,15.35) v1(68.58,20.18) v1(69.72,47.01) v1(70.61,4.81) v1(70.87,11.56) v1(72.39,12.81) v1(72.52,21.7) v1(72.77,9.89) v1(72.9,88.11) v1(73.15,77.6) v1(75.19,79.38) v1(76.46,4.81) v1(76.71,88.11) v1(77.22,34.16) v1(77.34,27.04) v1(77.98,65.25) v1(78.61,44.02) v1(78.74,71.98) v1(79.25,67.78) v1(79.5,7.73) v1(79.63,75.41) v1(79.63,72.86) v1(79.63,47.45) v1(79.63,44.91) v1(79.76,57.15) v1(79.89,10.54) v1(80.27,82.55) v1(80.52,88.11) v1(80.52,38.1) v1(80.89,74.12) v1(80.89,46.17) v1(81.41,28.83) v1(81.54,64.86) v1(82.17,75.41) v1(82.17,72.86) v1(82.17,47.45) v1(82.17,44.91) v1(82.42,41.4) v1(82.55,69.85) v1(82.68,67.4) v1(83.19,43.56) v1(83.31,71.63) v1(83.69,55.24) v1(83.69,25.78) v1(84.84,13.19) v1(84.97,88.11) v1(84.97,35.05) v1(85.09,4.81) v1(87,25.78) v1(87.63,23.75) v1(88.01,45.59) v1(88.27,82.04) v1(88.52,73.37) v1(88.52,55.96) v1(88.78,88.11) v1(88.78,77.94) v1(89.03,9.64) v1(89.79,31.5) v1(90.05,70.33) v1(90.17,50.24) v1(90.17,48.13) v1(90.55,66.39) v1(90.55,19.29) v1(90.68,83.66) v1(92.08,75.31) v1(92.08,68.29) v1(92.58,88.11) v1(92.71,61.44) v1(93.86,25.13) v1(96.78,32.26) v1(97.16,80.64) v1(97.16,75.56) v1(97.16,63.5) v1(97.28,41.4) v1(97.41,51.18) v1(97.79,69.85)
ESP_BOOT: length 13.5
  TOP w0.3: v1(69.26,58.72) R57.2 66.45,58.72 66.11,59.06 U19.25
  BOTTOM w0.3: J1.6 69.26,64.72 v1(69.26,58.72)
ESP_EN: length 35.5
  TOP w0.3: U19.3 43.41,73.03 43.34,72.97 C37.1 42.17,72.97 41.59,72.39 R37.2 v1(40.94,70.78)
  BOTTOM w0.3: J1.5 64.64,71.88 42.04,71.88 v1(40.94,70.78)
G2: length 19.1
  TOP w0.3: 63.72,60.34 76.44,60.34 78.61,58.16 D6.C
G4: length 25.8
  TOP w0.3: U19.28 77.33,62.87 85.3,54.9 D5.C
G5: length 29
  TOP w0.3: 78.61,82.86 78.17,82.86 78.16,82.84 77.04,82.84 71.5,77.31 71.5,66.42 69.85,64.77 67.31,64.77 66.67,65.41 U19.30
G12: length 32.1
  TOP w0.3: U5.14 52.83,37.65 55.88,40.69 55.88,50.16 53.34,52.7 47.62,52.7 45.73,54.6 U19.14
G13: length 27.1
  TOP w0.3: U5.5 63.78,41.65 59.05,46.37 59.05,50.8 55.88,53.98 50.8,53.98 50.28,54.5 U19.16
G14: length 37.2
  TOP w0.3: U19.10 43.32,64.14 41.02,61.85 41.02,53.59 47.62,46.99 47.62,36.91 48.9,35.65 U5.15
G15: length 47.5
  TOP w0.3: R11.1 R12.1 67.56,28.82 69.85,31.11 71.75,31.11 73.66,33.02 73.66,38.73 71.75,40.64 71.75,50.16 68.58,53.34 60.33,53.34 59.17,54.49 U19.23
G16: length 25.4
  TOP w0.3: 80.25,48.6 80.25,49.17 79.94,49.48 75.62,49.48 70.48,54.61 60.74,54.61 60.44,54.91 U19.24
G17: length 22.1
  TOP w0.3: U19.27 76.83,61.6 82.42,56.01 D10.C
G18: length 34.5
  TOP w0.3: 86.23,82.86 84.54,84.55 75.53,84.55 69.85,78.87 69.85,70.48 69.22,69.85 67.31,69.85 66.68,69.22 U19.33
G19: length 28.8
  TOP w0.3: U22.14 80.25,77.13 79.94,77.43 74.89,77.43 72.39,74.93 72.39,65.41 70.48,63.5 66.67,63.5 66.03,64.14 U19.29
G21: length 31.6
  TOP w0.3: 82.42,82.86 81.49,83.79 76.42,83.79 70.61,77.98 70.61,68.71 69.22,67.31 66.67,67.31 66.05,66.69 U19.31
G25: length 30.8
  TOP w0.3: U19.11 44.07,62.87 44.07,62.88 43.32,62.88 42.16,61.72 42.16,54.36 48.9,47.62 48.9,40.02 49.27,39.65 U5.13
G26: length 31.2
  TOP w0.3: U5.12 53.19,41.65 53.98,42.43 53.98,50.16 52.07,52.07 46.35,52.07 43.31,55.12 43.31,59.91 43.73,60.34 45.73,60.34
G27: length 37.1
  TOP w0.3: U5.4 63.23,39.65 57.15,45.72 57.15,50.8 54.61,53.34 48.9,53.34 47.88,54.35 47.88,59.91 48.13,60.16 48.13,61.18 47.71,61.6 U19.12
G32: length 47.9
  TOP w0.3: 43.69,35.63 42.62,35.63 42.55,35.56 ; 43.69,35.63 C50.1 R49.2 45.56,37.31 46.35,38.1 46.35,41.61 46.05,41.91 42.3,41.91 J23.2 38.73,61.98 43.44,66.69 U19.8 ; 43.69,35.63 43.62,35.56 42.55,35.56 ; 42.55,35.56 42.11,35.12 U29.3
G34: length 10.2
  TOP w0.3: U19.6 43.44,69.22 40.02,69.22 38.73,67.94 37.39,67.94 37.05,67.61 R46.2
I+: length 13.4
  TOP w0.3: J18.1 92.22,15.08 88.6,15.08 88.27,15.41 R25.2 82.84,15.41 82.8,15.46 C11.2 R23.2
IN: length 2.1
  TOP w0.4: C25.1 76.31,13.66 75.71,13.06 75.68,13.06 75.67,13.05 U4.8
U0RXD: length 4.5
  TOP w0.3: J1.4 67.32,70.5 U19.34
U0TXD: length 5
  TOP w0.3: U19.35 66.05,71.77 J1.3
U1_VOUT: length 31.8
  TOP w0.4: U1.5 46.67,5.45 46.79,5.33 R19.2
  TOP w0.508: 69.53,9.24 69.53,8.13 69.48,8.09 C9.1 69.48,6.36 67.31,4.19 47.88,4.19 47.63,4.45 47.63,4.46 47.49,4.59 R19.2 47.49,6.07 47.5,6.09 C22.1
VOUT: length 91.8
  TOP w0.5: 61.47,17.76 54.47,17.76 51.67,14.97 37.73,14.97 36.2,16.51 36.2,62.23 41.92,67.95 U19.7
  TOP w0.508: 65.78,13.7 65.78,15.63 63.64,17.76 61.47,17.76
N01978: length 20.3
  TOP w0.508: VR3.1 11.3,66.45 11.46,66.29 R3.1 12.18,64.77 12.19,64.78 18.91,64.78 19.8,63.89 19.8,60.71 21.03,59.48 U2.4
N02781: length 24.1
  TOP w0.508: VR2.1 31.62,19.28 31.47,19.43 R6.1 31.47,23.65 30.36,24.76 24.02,24.76 23.13,25.65 23.13,28.82 21.9,30.05 U3.4
N06098: length 3.4
  TOP w0.203: U21.1 83.69,24.48 83.8,24.38 R10.2
N06176: length 22.5
  TOP w0.3: J22.3 80.79,22.59 79.89,23.49 79.89,26.39 80.52,27.02 U21.2 82,27.91 82.9,28.82 R13.2
N06202: length 2.5
  TOP w0.3: R13.1 D7.A
N68395: length 26.7
  TOP w0.3: 44.26,9.26 44.26,10.03 44.47,10.24 C20.1 v1(45.71,11.16)
  TOP w0.508: R16.2 45.7,19.9 47.11,21.31 U6.2 50.52,21.31 50.7,21.13 C19.2 52.69,21.13 53.36,21.8 53.36,22.73 53.98,23.36 54.86,23.36
  BOTTOM w0.3: U6.2 49.75,17.96 45.71,13.91 v1(45.71,11.16)
N68453: length 8.4
  TOP w0.3: 43.59,21.38 44.2,21.38 44.27,21.45 R16.1 ; 43.59,21.38 43.59,22.64 44.03,23.07 48.02,23.07 U6.1 ; 43.59,21.38 R17.2
N68779: length 2.7
  TOP w0.3: C21.1 38.32,8.19 38.52,7.99 U1.2
N68835: length 2.7
  TOP w0.3: C21.2 38.34,5.26 38.52,5.45 U1.4
N68993: length 8.2
  TOP w0.508: ZERO.1 69.47,21.31 R9.2
N68997: length 9.7
  TOP w0.508: 64.25,21.31 63.53,21.31 63.39,21.17 C23.1 C24.1 59.84,21.17 59.54,21.46 U7.2 U7.1 56.56,21.46 56.22,21.8 R18.2
N69029: length 11
  TOP w0.3: VR4.2 57.4,14.32 J16.2 61.53,11.15 61.54,11.16 65.78,11.16
N69045: length 3
  TOP w0.3: R19.1 49.94,5.33 50.8,6.19 D9.A
N69079: length 10
  TOP w0.3: R20.2 79.25,11.93 79.89,12.56 79.89,14.59 79.5,14.97 78.34,14.97 ZERO.2
N69131: length 7.5
  TOP w0.3: U4.3 72,10.52 73.27,11.79 U4.7 75.67,11.79 75.81,11.93 R22.1
N69159: length 18
  TOP w0.3: U4.1 68.58,13.05 67.94,13.7 R39.2 67.33,13.06 66.82,12.56 65.15,12.56 60.96,16.75 56.01,16.75 VR4.1
N69271: length 20.8
  TOP w0.3: U4.2 68.56,11.79 67.94,11.16 R7.2 67.33,10.41 66.68,9.76 59.42,9.76 J16.1 57.28,10.39 57.28,9.25 58.03,8.49 J17.1 R24.2
N69285: length 3.9
  TOP w0.3: R20.1 R22.2 75.81,10.38 75.67,10.52 U4.6
N69431: length 10.8
  TOP w0.3: J17.2 59.19,5.95 53.85,5.95 53.45,6.35 R24.1 R26.1
N69489: length 9.9
  TOP w0.3: R23.1 82.17,11.29 82.03,11.15 C12.2 82.03,10.49 80.78,9.24 74.48,9.24
N70746: length 5.6
  TOP w0.3: C27.1 76.13,42.4 76.36,42.62 U12.1 77.22,43.63 77.6,44.01 77.6,44.58 77.89,44.87 U8.20
N70822: length 4.5
  TOP w0.3: 81.55,48.6 81.55,49.48 81.56,49.48 82.47,50.39 R28.2 82.47,52.21 82.42,52.25 D10.A
N70882: length 17.8
  TOP w0.3: U8.5 82.19,43.11 83.44,41.86 83.44,40.97 84.69,39.72 U13.3 86.83,39.72 86.89,39.77 U10.2 88.52,39.12 88.65,38.99 88.65,38.48 89.66,37.47 91.55,37.47 J12.2
N70902: length 7.5
  TOP w0.3: 82.19,48.6 82.19,48.87 82.86,49.53 85.73,49.53 86.28,50.08 R29.2 86.28,52.21 86.23,52.25 D5.A
N70994: length 6
  TOP w0.3: U13.2 84.72,41.09 84.2,41.61 84.2,44.66 83.99,44.87 U8.6
N71002: length 5.8
  TOP w0.3: 80.89,48.6 80.89,49.37 80.19,50.08 78.96,50.08 78.66,50.38 R30.2 78.66,52.21 78.61,52.25 D6.A
N71034: length 15.3
  TOP w0.3: U8.7 84.19,45.52 85.12,44.59 C28.1 87.7,44.59 88.52,43.77 U10.1 92.95,41.14 J12.1
N71106: length 11.6
  TOP w0.3: U8.8 84.76,46.17 85.08,46.48 C28.2 87.39,46.48 87.66,46.76 91.08,46.76 91.23,46.6 J11.2
N71126: length 13.6
  TOP w0.3: U8.9 84.27,46.82 85.04,47.59 86.24,47.59 86.78,48.12 U11.1 88.52,48.77 89.14,49.4 92.3,49.4 J11.1
N77169: length 2.5
  TOP w0.508: D4.A R4.2
N77173: length 2.5
  TOP w0.508: R1.2 D2.A
N121988: length 3.4
  TOP w0.508: U21.4 71.31,24.48 71.2,24.38 R11.2
N166063: length 5.6
  TOP w0.3: U22.20 77.89,72.83 77.6,72.53 77.6,71.96 77.22,71.58 U23.1 76.36,70.58 76.13,70.35 C40.1
N166139: length 4.5
  TOP w0.3: U22.12 81.55,77.44 81.56,77.44 82.47,78.34 R43.2 82.47,80.17 82.42,80.2 D14.A
N166201: length 19.4
  TOP w0.3: J20.2 92,63.97 92,66.59 90.86,67.72 U24.2 86.89,67.72 86.83,67.67 U25.3 84.69,67.67 83.44,68.93 83.44,70.33 83.06,70.71 82.55,70.71 82.19,71.06 U22.5
N166221: length 7.4
  TOP w0.3: U22.11 82.19,76.82 83.07,77.69 85.85,77.69 86.28,78.11 R44.2 86.28,80.17 86.23,80.2 D15.A
N166321: length 6
  TOP w0.3: U22.6 83.99,72.83 84.2,72.61 84.2,69.56 84.72,69.05 U25.2
N166329: length 5.8
  TOP w0.3: U22.13 80.89,77.33 80.19,78.03 78.96,78.03 78.66,78.33 R45.2 78.66,80.17 78.61,80.2 D16.A
N166363: length 16.6
  TOP w0.3: U22.7 84.19,73.47 85.12,72.54 C41.1 87.7,72.54 88.52,71.72 U24.1 93.47,69.09 94.58,68 J20.1
N166435: length 12
  TOP w0.3: U22.8 84.76,74.12 85.08,74.44 C41.2 87.39,74.44 87.66,74.71 U26.2 90.47,74.71 91.63,73.56 94.58,73.56
N166455: length 12.8
  TOP w0.3: 94.58,78.64 92.02,76.08 U26.1 85.39,76.08 84.08,74.78 U22.9
N209857: length 7.8
  TOP w0.3: U29.2 41.46,29.23 41.53,29.16 C51.1 43.87,28.52 VR6.2
N210245: length 2.5
  TOP w0.3: D19.C R50.1
N210249: length 2
  TOP w0.3: U29.1 40.13,33.08 39.97,32.92 R50.2

## Copper pours and planes (outline as drawn; the poured copper is in the pictures)
3.3V on TOP: 78.84,73.63 78.84,73.32 77.65,73.32 76.76,72.43 74.75,72.43 74.58,72.26 74.58,71.09 73.43,71.09 73.43,72.84 73.69,73.09 75.39,73.09 75.49,73.2 75.49,75.84 75.69,76.04 77.17,76.04 77.47,75.74 77.47,73.93 77.78,73.63
3.3V on TOP: 17.91,67.44 23.12,67.44 25.02,69.34 25.02,73.03 26.8,74.8 34.55,74.8 35.44,73.91 45.72,73.91 45.85,73.79 47.37,73.79 47.37,74.8 47.24,74.93 43.56,74.93 43.18,75.31 38.1,75.31 32.51,80.9 15.37,80.9 13.97,79.5 13.97,76.33 13.08,75.44 9.65,75.44 9.53,75.31 9.53,70.61 9.91,70.23 12.57,70.23 13.97,71.63 17.15,71.63 17.4,71.37 17.4,67.94
3.3V on TOP: 78.84,45.67 78.84,45.37 77.65,45.37 76.76,44.48 74.75,44.48 74.58,44.3 74.58,43.13 73.43,43.13 73.43,44.88 73.69,45.14 75.39,45.14 75.49,45.24 75.49,47.88 75.69,48.09 77.17,48.09 77.47,47.78 77.47,45.98 77.78,45.67
3.3V on BOTTOM: 64.77,76.67 64.79,76.69 66.15,76.69 67.06,77.6 67.06,79.5 67.31,79.76 73.66,79.76 76.58,76.83 76.58,75.31 76.58,75.31 75.82,74.55 66.67,74.55 64.9,72.77 41.66,72.77 40.39,71.5 40.39,48.77 41.53,47.62 41.53,44.32 42.55,43.31 53.72,43.31 66.42,56.01 74.68,56.01 76.58,54.1 76.58,48.26 76.58,48.26 76.58,37.85 75.19,36.45 69.72,36.45 68.58,35.31 68.58,24.26 67.94,23.62 65.03,23.62 64.26,22.86 36.2,22.86 34.8,24.26 34.8,69.34 36.45,70.99 36.45,75.56 37.56,76.67
24V on TOP: 0.64,43.31 5.46,43.31 6.73,44.58 19.56,44.58 22.1,47.12 22.1,54.99 25.53,54.99 25.66,54.86 25.66,50.67 26.29,50.04 28.58,50.04 29.09,49.53 29.09,46.48 28.2,45.59 25.27,45.59 22.86,43.18 22.86,36.7 20.83,34.67 17.4,34.67 17.4,37.97 15.88,39.5 8.89,39.5 8,38.61 8,8.26 12.83,3.43 86.23,3.43 92.33,9.53 94.74,9.53 95.38,10.16 95.38,25.4 94.36,26.42 89.41,26.42 89.16,26.67 84.33,26.67 84.33,27.81 84.58,28.07 84.58,29.21 85.09,29.72 96.52,29.72 97.67,28.57 97.67,9.53 95.89,7.75 95.89,7.74 95.12,6.98 92.47,6.98 86.76,1.27 11.43,1.27 4.7,8 4.7,35.81 0.64,39.88
GND on TOP: 98.5,0.5 0.5,0.5 0.5,89.5 98.5,89.5 ; 7 cut-outs
GND on BOTTOM: 98.5,0.5 0.5,0.5 0.5,89.5 98.5,89.5
VCC_IN on TOP: 48.52,14.22 37.72,14.22 36.7,15.24 27.18,15.24 25.53,16.89 25.53,21.21 25.02,21.72 20.58,21.72 19.18,20.32 19.18,4.95 19.69,4.45 25.78,4.45 26.16,4.83 26.16,9.02 27.05,9.91 30.86,9.91 30.99,9.78 36.83,9.78 39.12,12.06 48.26,12.06 48.52,12.32
IN on TOP: 46.36,16.11 46.36,19.54 47.37,20.56 49.15,20.56 49.34,20.37 49.98,20.37 50.04,20.3 67.19,20.3 71.5,15.99 75.44,15.99 76.71,14.72 76.71,13.32 76.2,12.81 73.79,12.81 73.79,13.95 73.53,14.21 70.87,14.21 66.55,18.53 54.22,18.53 51.55,15.86 46.61,15.86
N02042 on TOP: 22.09,55.63 32.63,55.63 33.9,56.9 33.9,72.64 33.14,73.41 29.46,73.41 29.46,65.03 26.92,62.49 26.92,57.92 25.52,56.52 22.09,56.52
N02845 on TOP: 20.84,33.9 10.3,33.9 9.03,32.63 9.03,17.14 9.91,16.26 13.47,16.26 13.47,24.5 16.01,27.05 16.01,31.62 17.41,33.01 20.84,33.01
N70734 on TOP: 80.39,44.12 80.39,43.01 79.83,42.45 79.83,41.02 78.84,41.02 78.84,42.73 79.45,43.34 79.45,44.12 79.48,44.15 79.71,44.15 79.73,44.12 79.73,43.23 79.76,43.21 80.06,43.21 80.09,43.23 80.09,44.12 80.11,44.15 80.37,44.15
N70834 on TOP: 80.7,42.45 80.7,41.02 81.69,41.02 81.69,44.12 81.66,44.15 81.43,44.15 81.38,44.1 81.38,43.23 81.36,43.21 81.08,43.21 81.05,43.23 81.05,44.12 81.03,44.15 80.77,44.15 80.75,44.12 80.75,42.5
N166051 on TOP: 80.39,72.08 80.39,70.96 79.83,70.4 79.83,68.98 78.84,68.98 78.84,70.68 79.45,71.29 79.45,72.08 79.48,72.1 79.71,72.1 79.73,72.08 79.73,71.19 79.76,71.16 80.06,71.16 80.09,71.19 80.09,72.08 80.11,72.1 80.37,72.1
N166153 on TOP: 80.7,70.4 80.7,68.98 81.69,68.98 81.69,72.08 81.66,72.1 81.43,72.1 81.38,72.05 81.38,71.19 81.36,71.16 81.08,71.16 81.05,71.19 81.05,72.08 81.03,72.1 80.77,72.1 80.75,72.08 80.75,70.45

## Text on the board
User.43: 1.6 MM | +/- 10% | L02   SIGNAL         1.5 OZ. | SOLDER MASK | SILK SCREEN | SECONDARY SIDE | LAYER STACKUP | COPPER    SINGLE ENDED          DIFFERENTIAL | ARTWORK               TYPE        THICKNESS  WIDTH" IMPEDANCE      WIDTH" IMPEDANCE | ----------------------------------------------------------------------------------- | PRIMARY SIDE | L01   SIGNAL         1.5 OZ. | NOTES: (UNLESS OTHERWISE SPECIFIED) | MATERIALS: | A. ALL EXPOSED CONDUCTIVE PATTERN AREAS NOT COVERED WITH SOLDERMASK OR | SUPPLIED DATA.  INCH DIMENSIONS ARE FOR REFERENCE ONLY. | B. APPLY GREEN SOLDER MASK PER IPC-SM-840, CLASS H, | FABRICATE PCB IN ACCORDANCE WITH IPC-6012, CLASS 2; PER IPC-6011 USING | CUSTOMER SUPPLIED DATA FILES. | C. SILKSCREEN OVER SOLDER MASK WITH PERMANENT, | MILLIMETERS (MM) ARE THE CONTROLLING DIMENSIONS FOR THE DRAWINGS AND | FINISH: | THIEVING: | ALL HOLES SHALL BE LOCATED WITHIN +/-0.2mm OF TRUE POSITION. | B. PREPREG SHALL BE ISOLA 370HR. | A. LAMINATE SHALL BE ISOLA 370HR. | C. ALL COPPER THICKNESS IS 1/2 OZ. BEFORE PLATING. | LAYER-TO-LAYER REGISTRATION SHALL BE WITHIN +/-0.2mm. | TOLERANCES: | REMOVE ALL UNUSED PADS ON INNER LAYERS. | D. SURFACE MOUNT PAD PLATING MUST BE FLAT TO A MAXIMUM OF 0.08 ABOVE | A. WARP OR TWIST OF BOARD SHALL NOT EXCEED 1% | C. REMOVE ALL BURRS AND BREAK SHARP EDGES 0.4 MAXIMUM. | E. 1.5 MAXIMUM RADIUS ON ANY INSIDE CORNERS. | B. CONDUCTOR WIDTHS AND SPACING SHALL BE WITHIN +/- 0.02 OF GERBER DATA. | A. SUPPLIER MAY ADD COPPER THIEVING TO COMPENSATE FOR LOW COPPER | B. COPPER THIEVING SHALL NOT INTERFERE WITH IMPEDANCE CONTROLLED TRACES. | OTHER PLATING SHALL BE PLATED WITH HASL. | TO BOTH SIDES OF THE BOARD OVER BARE COPPER. VIA HOLES | COVERED WITH SOLDERMASK DO NOT NEED TO BE PLUGGED. | HIGH TEMPERATURE, NONCONDUCTIVE, WHITE INK PER A-A-56032, TYPE II. | ANY CONDUCTIVE AREA AND BOARD EDGE. | DENSITY AREAS WHERE NECESSARY. KEEP THIEVING .127mm (.050") AWAY FROM | BOARD SURFACE. | 3. | 2. | 1. | 5. | 4. | 7. | 8. | 6.
User.45: FIGURE | FINISHED_SIZE | 0.3048 | 0.5 | 0.71 | 0.7112 | 0.762 | 1.07 | 1.2192 | 1.27 | 1.3 | 3.1999 | DRILL CHART: TOP to BOTTOM | ALL UNITS ARE IN MILLIMETERS | TOOL_SIZE | - | 0 | PLATED | NON-PLATED | QTY | 306 | 2 | 12 | 3 | 4 | 10
